# Altium PCB Simetrica2.PcbDoc
Units mil, origin at the board's own origin, x right, y up, seen from the top; angles counter-clockwise.
Board outline 4445 x 3035 mil, 2 copper layers (Top Layer, Bottom Layer); 36 components, 12 nets, 76 pads, 0 vias.
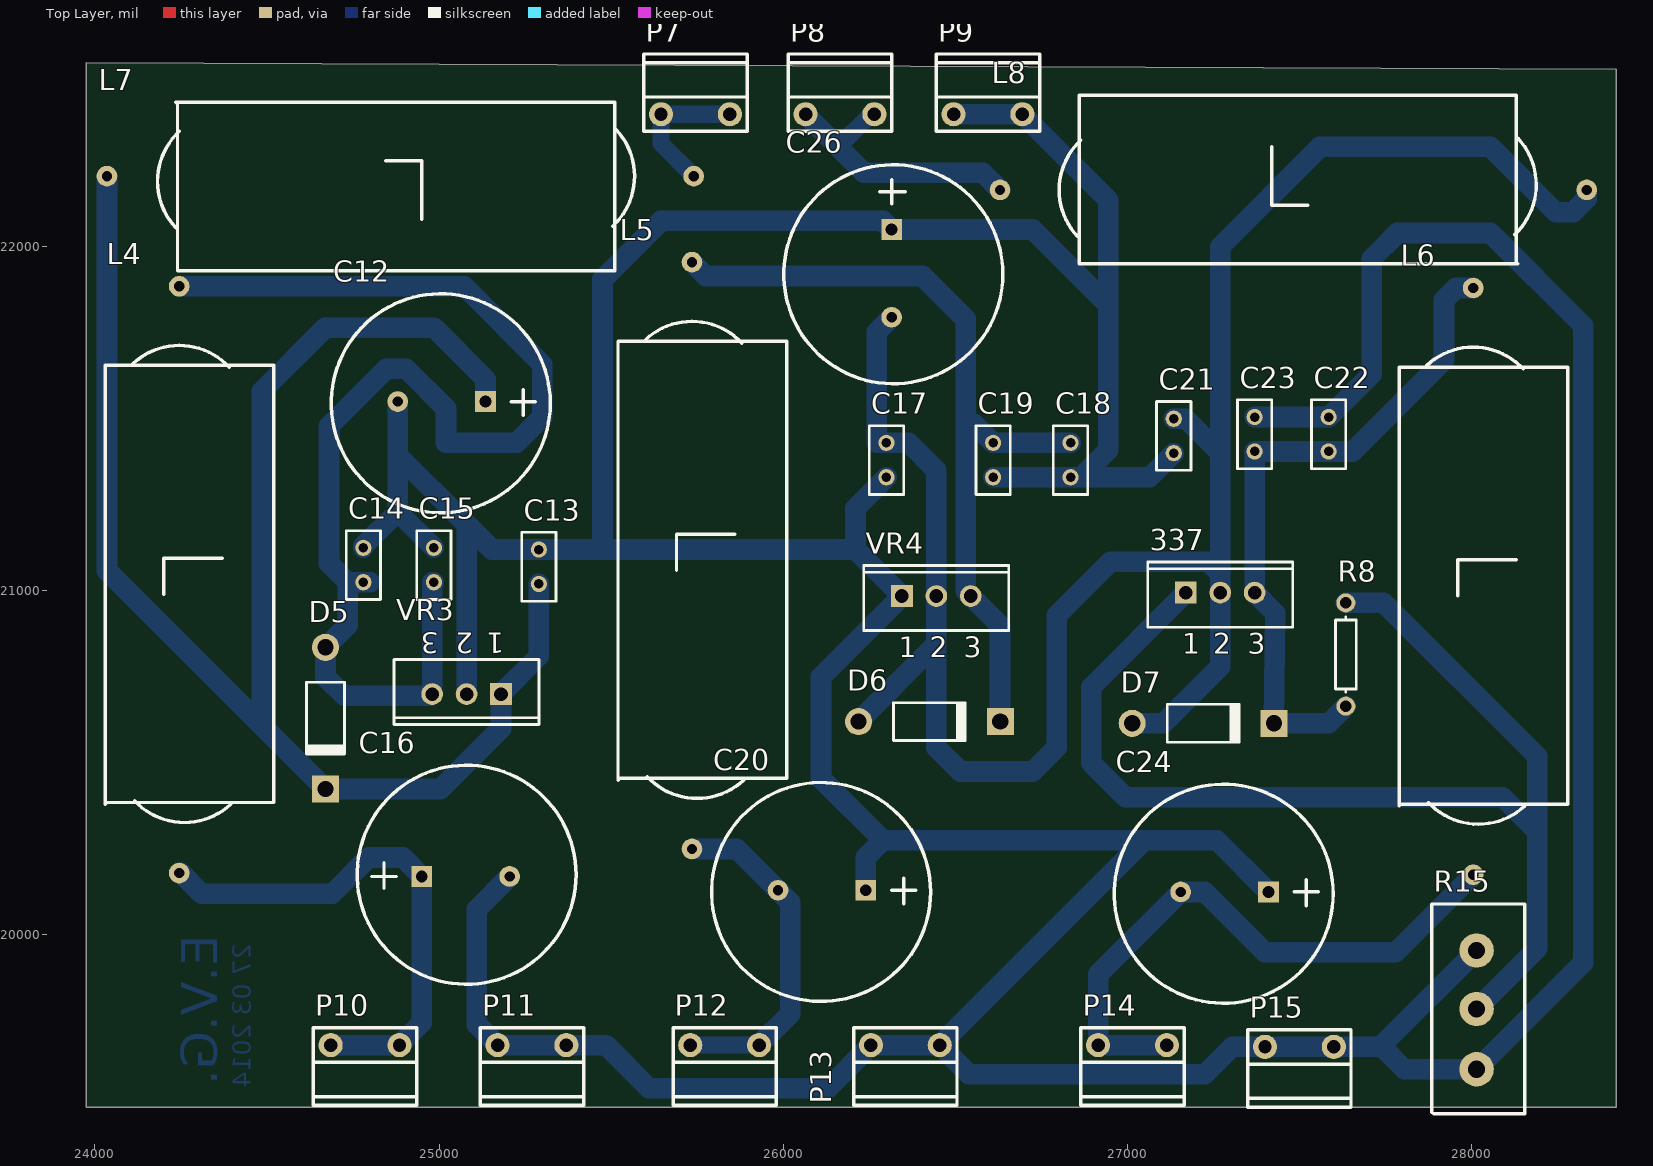
[diagram p0: Top Layer view]
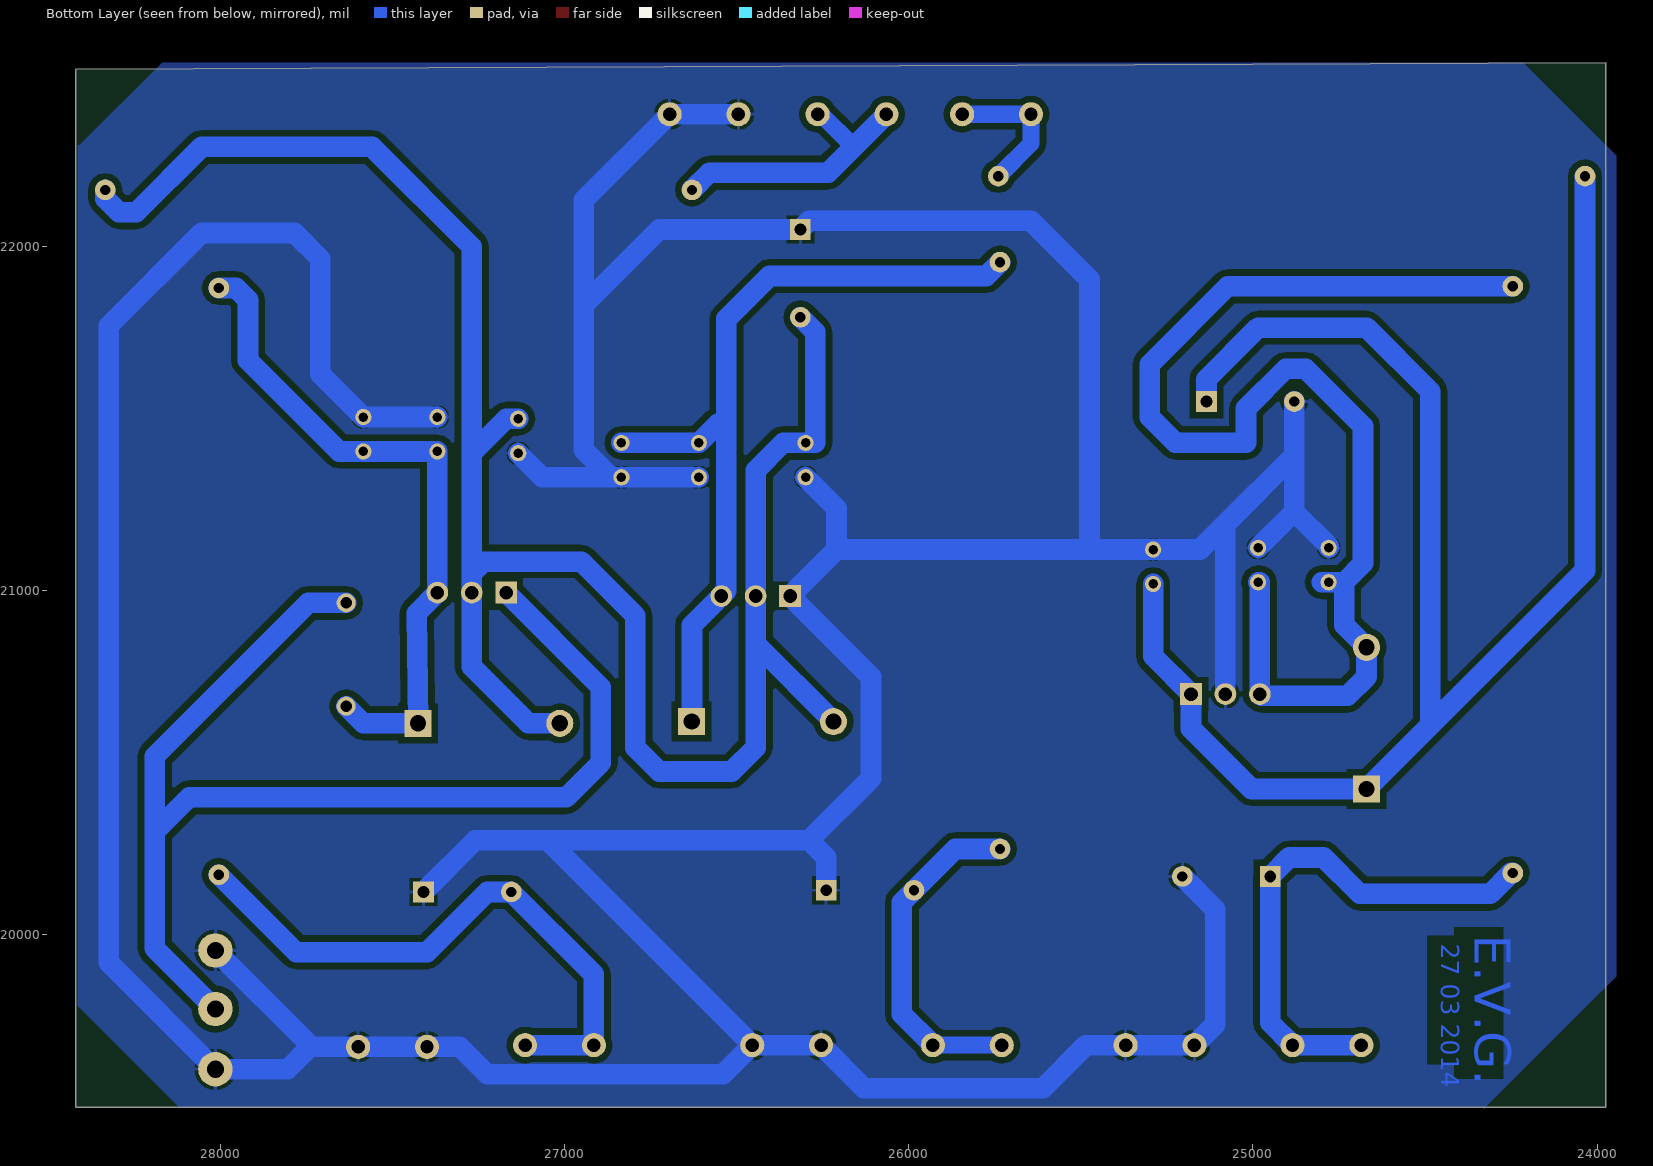
[diagram p1: Bottom Layer view, seen from below]

## Layer stack, top to bottom
Top Layer: signal copper 1.4
Dielectric: dielectric 12.6, FR-4, Dk 4.8
Bottom Layer: signal copper 1.4

## Board outline
28420,22515 28420,19500 23975,19500 23975,22535

## Design rules (kind name [scope] priority, off if disabled: settings)
Clearance [All] p1: gap=18
DiffPairsRouting [All] p1: maxlimit=20 minlimit=10 mostfreqgap=20 toplayer_maxgap=10 toplayer_prefgap=10 bottomlayer_mingap=15 maxuncoupledlength=500
PolygonConnect [All] p1: connectstyle=Relief reliefconductorwidth=10 reliefentries=4 polygonreliefangle="90 Angle" airgapwidth=10
RoomDefinition Simetrica [InComponentClass('Simetrica')] p1: confinementstyle=ConfineIn formatcopy=TRUE lockcomponents=FALSE outline 23975,19170 24150,19170 24150,19325 23975,19325
RoutingLayers [All] p1: top layer_v5=FALSE bottom layer_v5=TRUE
RoutingVias [All] p1: holewidth=28 width=50 viastyle="Through Hole" minholewidth=28 minwidth=50 maxholewidth=28 maxwidth=50
SolderMaskExpansion [All] p1: expansion=4
Width [All] p1: maxlimit=60 minlimit=50 preferedwidth=60
26 further rules are at their usual default settings.

## Components (designator, comment, footprint, x,y, rotation, side; value= is the part's Value field where it differs from the comment)
337 "vr5" TO-220-AB 27270,20995 r0 top
C12 "Cap Pol1" CAP4700 25005,21550 r180 top
C13 "Cap Tan" RAD-0.1 25290,21070 r90 top
C14 "Cap Tan" RAD-0.1 24780,21075 r90 top
C15 "Cap Pol2" RAD-0.1 24985,21075 r90 top
C16 "Cap Pol1" CAP4700 25080,20170 r0 top
C17 "Cap Tan" RAD-0.1 26300,21380 r270 top
C18 "Cap Tan" RAD-0.1 26835,21380 r270 top
C19 "Cap Pol2" RAD-0.1 26610,21380 r90 top
C20 "Cap Pol1" CAP4700 26110,20130 r180 top
C21 "Cap Tan" RAD-0.1 27135,21450 r270 top
C22 "Cap Tan" RAD-0.1 27585,21455 r90 top
C23 "Cap Pol2" RAD-0.1 27370,21455 r270 top
C24 "Cap Pol1" CAP4700 27280,20125 r180 top
C26 "Cap Pol1" CAP4700 26315,21920 r270 top
D5 "5A UFR" DO-204AL 24670,20630 r270 top
D6 "5A UFR" DO-204AL 26425,20620 r0 top
D7 "5A UFR" DO-204AL 27220,20615 r0 top
L4 "Inductor1" bobinita 24495,21555 r270 top
L5 "Inductor1" bobinita 25985,21625 r270 top
L6 "Inductor1" bobinita 28255,21550 r270 top
L7 "Inductor1" bobinita 25410,21955 r180 top
L8 "Inductor1" bobinita 26960,22415 r0 top
P7 "CA" cONECTOR 25845,22485 r180 top
P8 "CA" cONECTOR 26265,22485 r180 top
P9 "COMMON" cONECTOR 26695,22485 r180 top
P10 "CD" cONECTOR 24685,19580 r0 top
P11 "" cONECTOR 25170,19580 r0 top
P12 "-CD" cONECTOR 25730,19580 r0 top
P13 "X" cONECTOR 26255,19580 r0 top
P14 "-CD" cONECTOR 26915,19580 r0 top
P15 "z" cONECTOR 27400,19575 r0 top
R8 "Res1" AXIAL-0.3 27635,20815 r270 top
R15 "RPot" POT2 28015,19955 r0 top
VR3 "7812" TO-220-AB 25080,20700 r180 top
VR4 "7912" TO-220-AB 26445,20985 r0 top

## Footprints (in the part's own frame and the unit in brackets; to place one, negate y for a bottom-side part, rotate by r counter-clockwise, add the part's x,y. Pads: shape width x height; smd on the part's side, far side on the other; paste and mask are expansions set on the pad)
AXIAL-0.3 [mm] "Axial Device, Thru-Hole; 2 Leads; 0.3 in Pin Spacing"
  round 1.4 hole 0.85: 1(-3.81,0) 2(3.81,0)
  silkscreen extent -2.77,-0.76 2.77,0.76
bobinita [mil]
  round 60 hole 30: 1(-330,-250) 2(1375,-250)
  silkscreen extent -158,-465 1228,25
CAP4700 [mil]
  rect 60x60 hole 34: 1(-130,0)
  round 60 hole 30: 2(125,0)
  silkscreen extent -318,-313 318,323
cONECTOR [mil]
  round 70 hole 39: 1(0,100) 1(200,100)
  silkscreen extent -50,-75 250,150
DO-204AL [mm] "Diode, Axial; Body 5.2 x 2.7 mm (LxDia. max), Lead Dia. 0.86 mm (max)"
  round 2 hole 1.2: 1(-5.23,0)
  rect 2x2 hole 1.2: 2(5.23,0)
  silkscreen extent -2.65,-1.4 2.75,1.4
POT2 [mil]
  round 100 hole 50: 1(0,0) 2(0,-170) 3(0,-345)
  silkscreen extent -130,-475 140,135
RAD-0.1 [mm] "Radial Cap, Thru-Hole; 2 Leads; 0.1 in Pin Spacing"
  round 1.2 hole 0.7: 1(-1.27,0) 2(1.27,0)
  silkscreen extent -2.54,-1.27 2.54,1.27
TO-220-AB [mm] "TO, Thru-Hole, Vertical, Heatsink Mounted; 3 In-Line Leads; Pitch 2.54 mm"
  rect 1.6x1.6 hole 1: 1(-2.54,0)
  round 1.6 hole 1: 2(0,0) 3(2.54,0)
  silkscreen extent -5.35,-2.55 5.35,2.25

## Part data
337 VR3 VR4: library part "Volt Reg", "Voltage Regulator"
C12 C16 C20 C24 C26: "Polarized Capacitor (Radial)"
C13 C14 C17 C18 C21 C22: library part "Cap Pol2", "Polarized Capacitor (Axial)"
C15 C19 C23: library part "Cap Pol1", "Polarized Capacitor (Radial)"
D5 D6 D7: library part "Diode 1N5408", "3 Amp Medium Power Silicon Rectifier Diode"
L4 L5 L6 L7 L8: library part Inductor, "Inductor"
P7 P8 P9 P10 P11 P12 P13 P14 P15: library part Component_1
R8: "Resistor"
R15: "Potentiometer"

## Nets (pads, with @x,y where several pads share a name; then routed paths per layer and width w, separated by ;. In a path a pad name is that pad's centre, name@x,y a point inside that pad or via, vN(x,y) a via of type N, cw(c..) or ccw(c..) an arc to the next point about the centre after c; other vN are vias at no path point)
GND: C12.2 C13.2 C14.2 C15.2 C16.2 C17.2 C18.2 C19.1 C20.1 C21.2 C22.2 C23.1 C24.1 C26.1 P9.1 P11.1 P13.1 P15.1 R15.1 R15.3 VR3.2 VR4.1 | length 18201.5
  Bottom Layer w60: C14.2 24780,21130 24880,21230 ; C12.2 24880,21394 ; C15.2 24880,21230 ; VR3.2 25080,21194 ; C16.2 25110,20075 25110,19740 25170,19680 25370,19680 25485,19680 25610,19555 26130,19555 26255,19680 P13.1@26455,19680 ; C20.1 26240,20225 26290,20275 ; C17.2 26210,21240 26210,21120 ; P9.1@26495,22385 26695,22385 26945,22135 26945,21830 ; C19.1 C18.2 26865,21330 ; C21.2 27065,21330 26865,21330 ; C23.1 C22.2 27710,21630 27710,21965 27785,22040 28055,22040 28325,21770 28325,19920 R15.3 27805,19610 27740,19675 27735,19675 ; C24.1 27260,20275 27050,20275 ; R15.1 27735,19675 ; 24880,21230 24880,21394 ; 24880,21394 25080,21194 ; 25080,21194 25154,21120 C13.2 25475,21120 ; 25475,21120 26210,21120 ; 25475,21120 25475,21905 25645,22075 26290,22075 C26.1 26725,22050 26945,21830 ; 26210,21120 VR4.1 26110,20750 26110,20455 26290,20275 ; 26290,20275 27050,20275 ; P13.1@26455,19680 27050,20275 ; P13.1@26455,19680 26540,19595 27225,19595 27305,19675 27400,19675 27600,19675 27735,19675 ; 26865,21330 26945,21410 26945,21830
Net337_1: 337.2 C17.1 C21.1 C26.2 D6.1 D7.1 L8.2 VR4.2 | length 6085
  Bottom Layer w60: D6.1 26445,20845.91 ; C26.2 26272,21752 26272,21430 C17.1 26365,21430 26445,21350 VR4.2 26445,20845.91 ; D7.1 27105,20615 27270,20780 337.2 27270,21050 ; C21.1 27170,21500 27270,21400 ; L8.2 28335,22140 28295,22100 28245,22100 28055,22290 27560,22290 27270,22000 27270,21400 ; 26445,20845.91 26445,20545 26515,20475 26725,20475 26795,20545 26795,20928 26952,21085 27235,21085 27270,21050 ; 27270,21050 27270,21400
Net337_2: 337.1 R8.1 R15.2 | length 3535.4
  Bottom Layer w60: 337.1 26895,20720 26895,20500 26995,20400 28091,20400 28191,20300 ; R8.1 27745,20965 28191,20519 28191,20300 ; R15.2 28191,19961 28191,20300
Net337_3: 337.3 C22.1 C23.2 D7.2 L6.1 R8.2 | length 1978.9
  Bottom Layer w60: R8.2 27585,20615 D7.2 27430,20935 337.3 C23.2 C22.1 27655,21405 27920,21670 27920,21845 27955,21880 L6.1
NetC12_1: C12.1 C13.1 D5.2 L7.2 VR3.1 | length 4917
  Bottom Layer w60: L7.2 24035,21059.09 D5.2 25004.09,20424.09 25180,20600 VR3.1 25290,20810 C13.1 ; 24485,20609.09 24485,21580 24670,21765 24985,21765 25135,21615 C12.1
NetC14_1: C14.1 C15.1 D5.1 L4.1 VR3.3 | length 3677.5
  Bottom Layer w60: L4.1 25073,21885 25300,21658 25300,21505 25225,21430 25020,21430 25020,21530 24905,21645 24847,21645 24680,21478 24680,21080 24735,21025 ; C14.1@24800,21025 C14.1 24735,21025 ; C15.1 24980,21025 VR3.3 24975,20695 24725,20695 24670,20750 D5.1 24735,20900.91 24735,21025
NetC16_1: C16.1 L4.2 P10.1 | length 1513.1
  Bottom Layer w60: L4.2 24250,20180 24310,20120 24690,20120 24795,20225 24895,20225 C16.1 24950,19745 24885,19680 P10.1@24685,19680
NetC18_1: C18.1 C19.2 D6.2 L5.1 VR4.3 | length 2402.9
  Bottom Layer w60: L5.1 25775,21915 26405,21915 26530,21790 26530,21485 ; D6.2 26630,20620.91 26630,20900 VR4.3 26530,21000 26530,21485 ; C18.1 C19.2 26555,21485 26530,21485
NetC20_2: C20.2 L5.2 P12.1 | length 1001.5
  Bottom Layer w50: P12.1@25730,19680 P12.1@25930,19680
  Bottom Layer w60: L5.2 25865,20250 C20.2 26020,20095 26020,19770 P12.1@25930,19680
NetC24_2: C24.2 L6.2 P14.1 | length 1760.1
  Bottom Layer w60: P14.1@27115,19680 26915,19680 26915,19885 C24.2 27225,20125 27400,19950 27780,19950 L6.2
NetL7_1: L7.1 P7.1 | length 419.4
  Bottom Layer w50: L7.1 25645,22300 25645,22385 P7.1@25845,22385
NetL8_1: L8.1 P8.1 | length 800.5
  Bottom Layer w50: 26160,22290 26255,22385 P8.1@26265,22385
  Bottom Layer w60: P8.1@26065,22385 26160,22290 26235,22215 26580,22215 L8.1

## Polygon pours and split planes (outlines as drawn)
GND on Bottom Layer "Top Layer-No Net" (solid, pour order 6): 23950,22270 24215,22535 28170,22535 28410,22295 28415,22295 28415,19795 28120,19500 28075,19500 24335,19500 24330,19495 23945,19880 23945,19960 23945,22265 23950,22270

## Keep-outs
Keep-Out Layer:
  circle w10: c19480,18990 r120
  circle w10: c19480,21785 r120

## Other copper
Bottom Layer:
  text "E.V.G." at 24390,20000 h180 r90
  text "27 03 2014" at 24470,19975 h90 r90

## Text inside footprints (layer, text, board x,y; h text height)
337: Top Overlay "1" at 27160.16,20816.85 h59.06; Top Overlay "2" at 27250.31,20816.85 h59.06; Top Overlay "3" at 27350.31,20816.85 h59.06
VR3: Top Overlay "1" at 25189.84,20878.15 h59.06 r180; Top Overlay "2" at 25099.69,20878.15 h59.06 r180; Top Overlay "3" at 24999.69,20878.15 h59.06 r180
VR4: Top Overlay "1" at 26335.16,20806.85 h59.06; Top Overlay "2" at 26425.31,20806.85 h59.06; Top Overlay "3" at 26525.31,20806.85 h59.06